# EAGLE board HackflightBrushed (EAGLE 7.7.0)
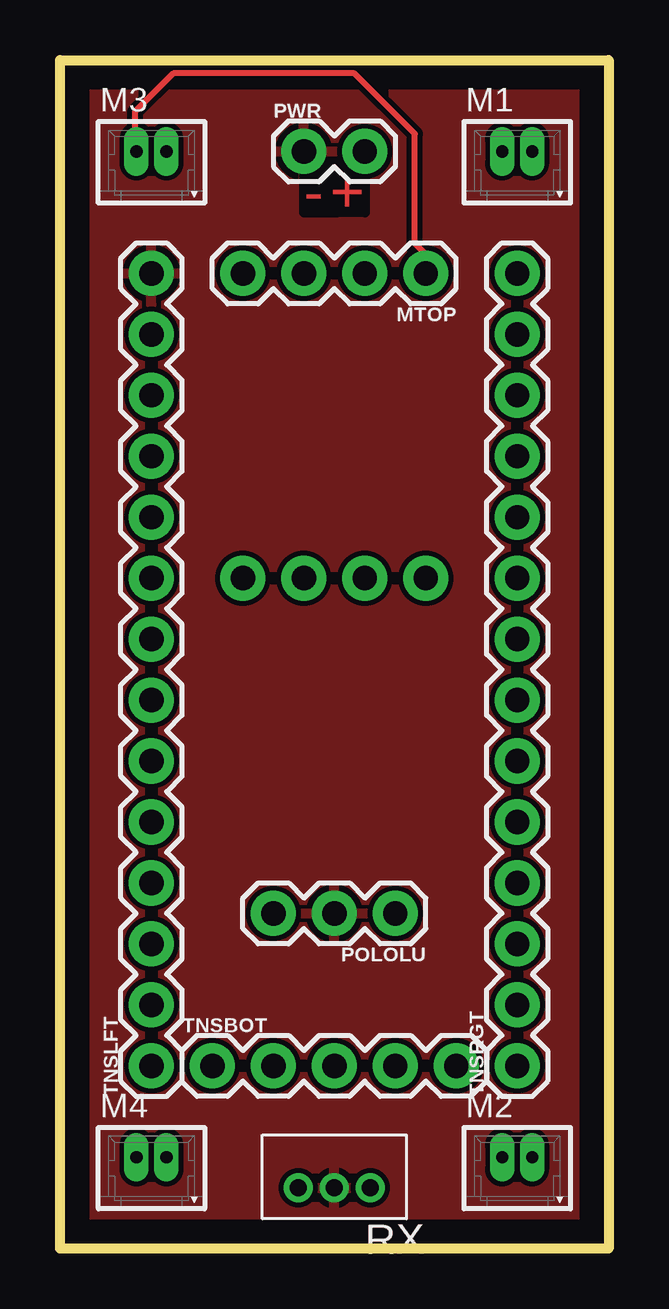
[diagram p0: board, top side]
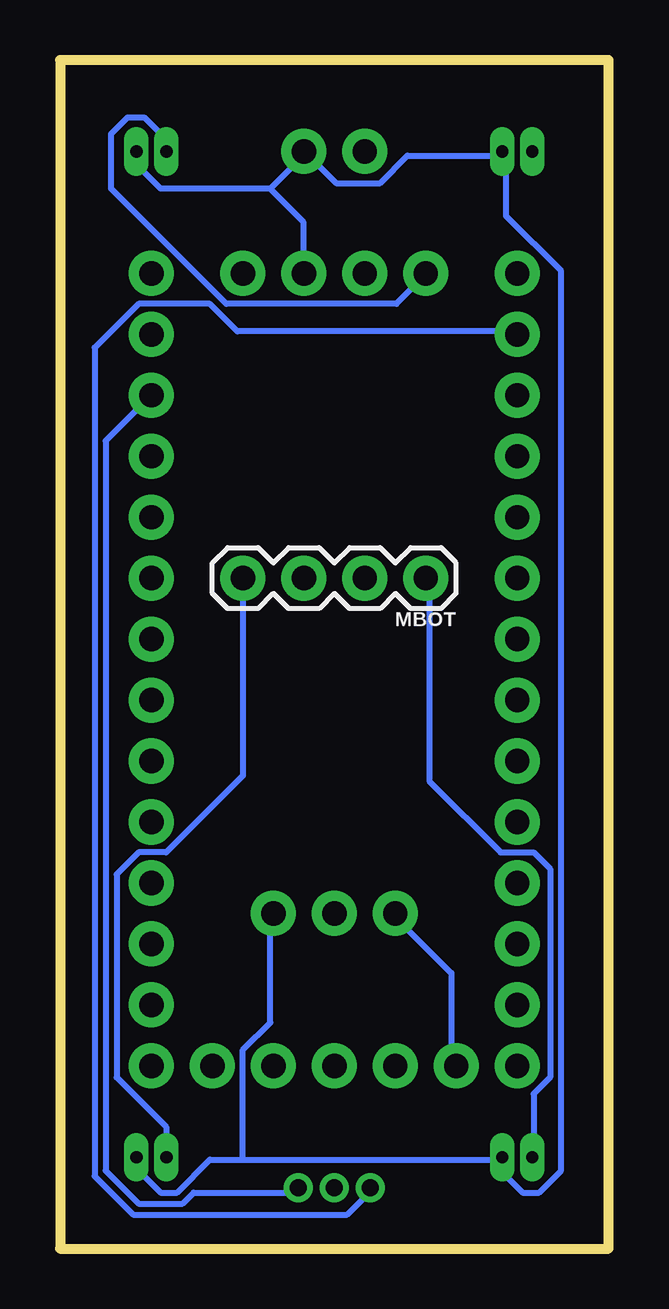
[diagram p1: board, bottom side, seen from below]

Size 22.86 x 49.53 mm. Coordinates in mm from the lower left corner, seen from the top.
Outline: 0,49.53 22.86,49.53 22.86,0 0,0 0,49.53
Copper layers (1*16): Top 0.035mm / dielectric 1.5mm / Bottom 0.035mm
Design rules "default": minimum track width 10mil, minimum drill 24mil, track to track 8mil, track to pad 8mil, pad to pad 8mil, via to via 8mil, smd to smd 8mil, copper to edge 40mil, drill to drill 8mil, minimum pad ring 10mil, minimum via ring 8mil, stop-mask expansion 4mil, vias tented up to drill 0mil, thermal gap 10mil

## Footprints (pad centres in the part's own frame; a part is rotated, then mirrored left to right if it is on the bottom)
53047-0210 = drill 0.508 long: 1 0.625,0; 2 -0.625,0
1X04 = drill 1.016 pad 1.88: 1 0,0; 2 2.54,0; 3 5.08,0; 4 7.62,0
1X03 = drill 1.016 pad 1.88: 1 0,0; 2 2.54,0; 3 5.08,0
1X02 = drill 1.016 pad 1.88: 1 0,0; 2 2.54,0
B3B-ZR = drill 0.7 pad 1.1: 1 -1.5,0; 2 0,0; 3 1.5,0
1X05 = drill 1.016 pad 1.88: 1 0,0; 2 2.54,0; 3 5.08,0; 4 7.62,0; 5 10.16,0
1X14 = drill 1.016 pad 1.88: 1 0,0; 2 2.54,0; 3 5.08,0; 4 7.62,0; 5 10.16,0; 6 12.7,0; 7 15.24,0; 8 17.78,0; 9 20.32,0; 10 22.86,0; 11 25.4,0; 12 27.94,0; 13 30.48,0; 14 33.02,0

## Placement (x,y rotation side)
M1  53047-0210  [53047-0210]  19.05,45.72 0 top
M2  53047-0210  [53047-0210]  19.05,3.81 0 top
M3  53047-0210  [53047-0210]  3.81,45.72 0 top
M4  53047-0210  [53047-0210]  3.81,3.81 0 top
MBOT  [1X04]  7.62,27.94 180 bottom
MTOP  [1X04]  15.24,40.64 180 top
POLOLU  [1X03]  13.97,13.97 180 top
PWR  [1X02]  10.16,45.72 0 top
RX  B3B-ZR  [B3B-ZR]  11.43,2.54 180 top
TNSBOT  [1X05]  6.35,7.62 0 top
TNSLFT  [1X14]  3.81,7.62 90 top
TNSRGT  [1X14]  19.05,7.62 90 top

## Library data of the parts
M1-M4 = con-molex-picoblade
MBOT MTOP = SparkFun-Connectors; PROD_ID: CONN-09696
POLOLU PWR TNSBOT TNSLFT TNSRGT = SparkFun-Connectors
RX = jst

## Nets
3.3V: RX.1 TNSRGT.12
5VREG: POLOLU.3 TNSBOT.1
GND: POLOLU.2 PWR.1 RX.2 TNSLFT.14
M1-: M1.2 MTOP.4
M1PWM: TNSRGT.8
M2-: M2.2 MBOT.4
M2PWM: TNSRGT.9
M3-: M3.2 MTOP.1
M3PWM: TNSRGT.10
M4-: M4.2 MBOT.1
M4PWM: TNSRGT.11
RX1: RX.3 TNSLFT.13
VBAT: M1.1 M2.1 M3.1 M4.1 MTOP.2 POLOLU.1 PWR.2

## Tracks (layer width: path | path; a pad name or v marks a point on that pad's centre or on a via)
3.3V
  Bottom 0.254: TNSRGT.12 20.95,33.66 20.95,3.25 19.58,1.88 17.75,1.88 17.3,2.34 12.95,2.34 RX.1
5VREG
  Bottom 0.254: TNSBOT.1 6.55,7.82 6.55,11.48 8.84,13.77 POLOLU.3
GND
  pour Top: 1.27,48.26 22.86,48.26 22.86,0 0,0 0,48.26
M1-
  Bottom 0.254: M1.2 18.44,45.77 18.44,46.23 19.36,47.14 20.04,47.14 20.73,46.46 20.73,44.17 15.93,39.37 8.84,39.37 7.7,40.51 MTOP.4
M2-
  Bottom 0.254: MBOT.4 15.24,19.71 18.44,16.51 19.58,16.51 20.5,15.6 20.5,7.14 18.44,5.08 18.44,3.94 M2.2
M3-
  Top 0.254: MTOP.1 15.24,41.43 14.78,41.88 14.78,46.46 12.27,48.97 4.72,48.97 3.12,47.37 3.12,45.77 M3.2
M4-
  Bottom 0.254: M4.2 3.12,3.94 3.12,6.45 2.44,7.14 2.44,15.82 3.12,16.51 4.5,16.51 7.47,19.48 7.47,27.94 MBOT.1
RX1
  Bottom 0.254: RX.3 9.98,2.34 10.9,1.42 19.81,1.42 21.41,3.02 21.41,37.54 19.58,39.37 16.61,39.37 15.47,38.23 3.81,38.23 TNSLFT.13
VBAT
  Bottom 0.254: 14.1,44.17 18.67,44.17 19.58,45.09 19.58,45.54 M1.1 | 14.1,44.17 12.72,45.54 PWR.2 12.5,45.54 11.35,44.4 9.52,44.4 8.38,45.54 4.5,45.54 M3.1 4.27,45.54 4.27,43.03 1.98,40.74 1.98,3.25 2.9,2.34 3.58,2.34 4.27,3.02 4.27,3.71 M4.1 4.5,3.71 15.24,3.71 | 14.1,44.17 12.72,42.8 12.72,40.74 MTOP.2 | 15.24,3.71 16.61,3.71 17.98,2.34 18.67,2.34 19.58,3.25 19.58,3.71 M2.1 | 15.24,3.71 15.24,8.28 14.1,9.42 14.1,13.77 POLOLU.1

## Text on the board
Top: - | +